# Altium PCB led-relay.PcbDoc
Units mil, origin at the board's own origin, x right, y up, seen from the top; angles counter-clockwise.
Board outline 1653.54 x 1312 mil, 2 copper layers (Top Layer, Bottom Layer), stack 44.685 mil thick; 10 components, 17 nets, 36 pads, 8 vias.
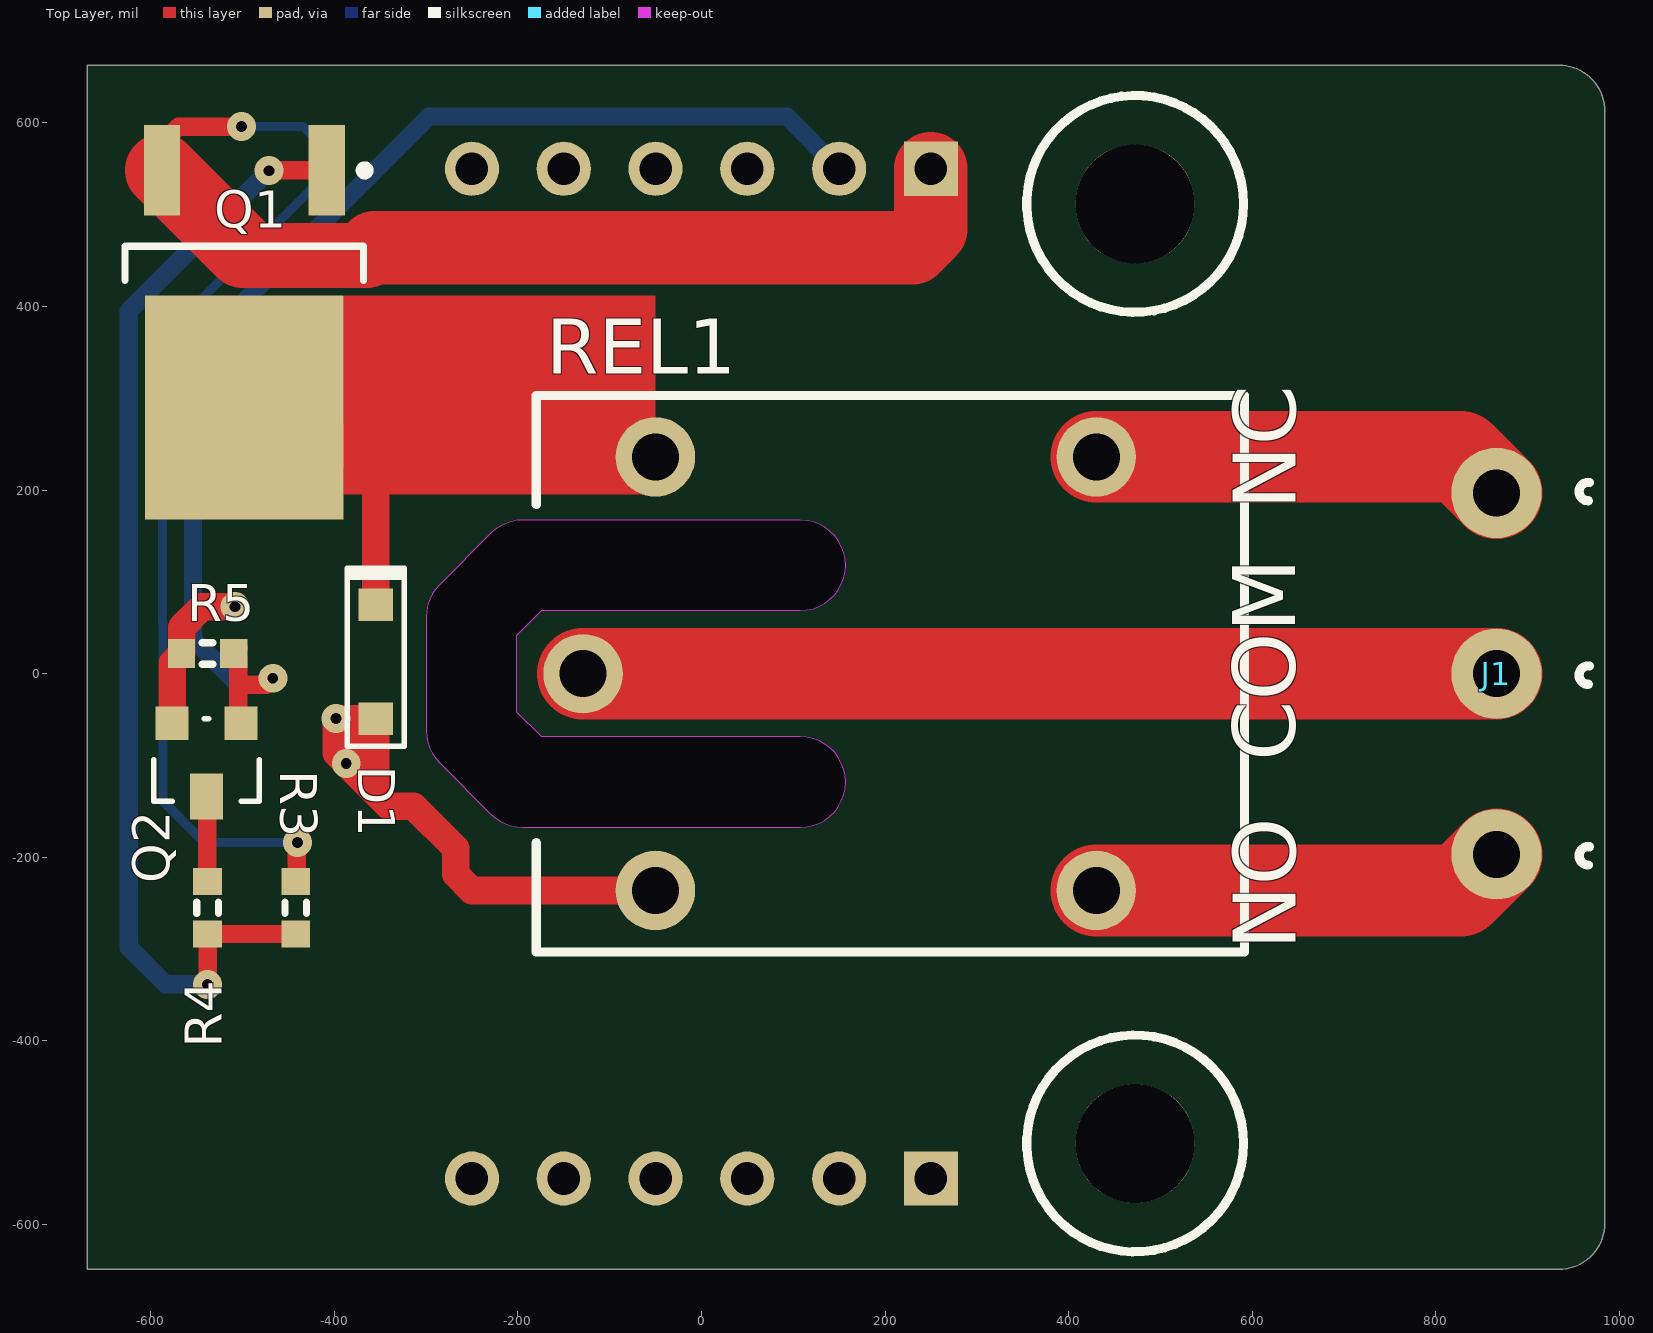
[diagram p0: Top Layer view]
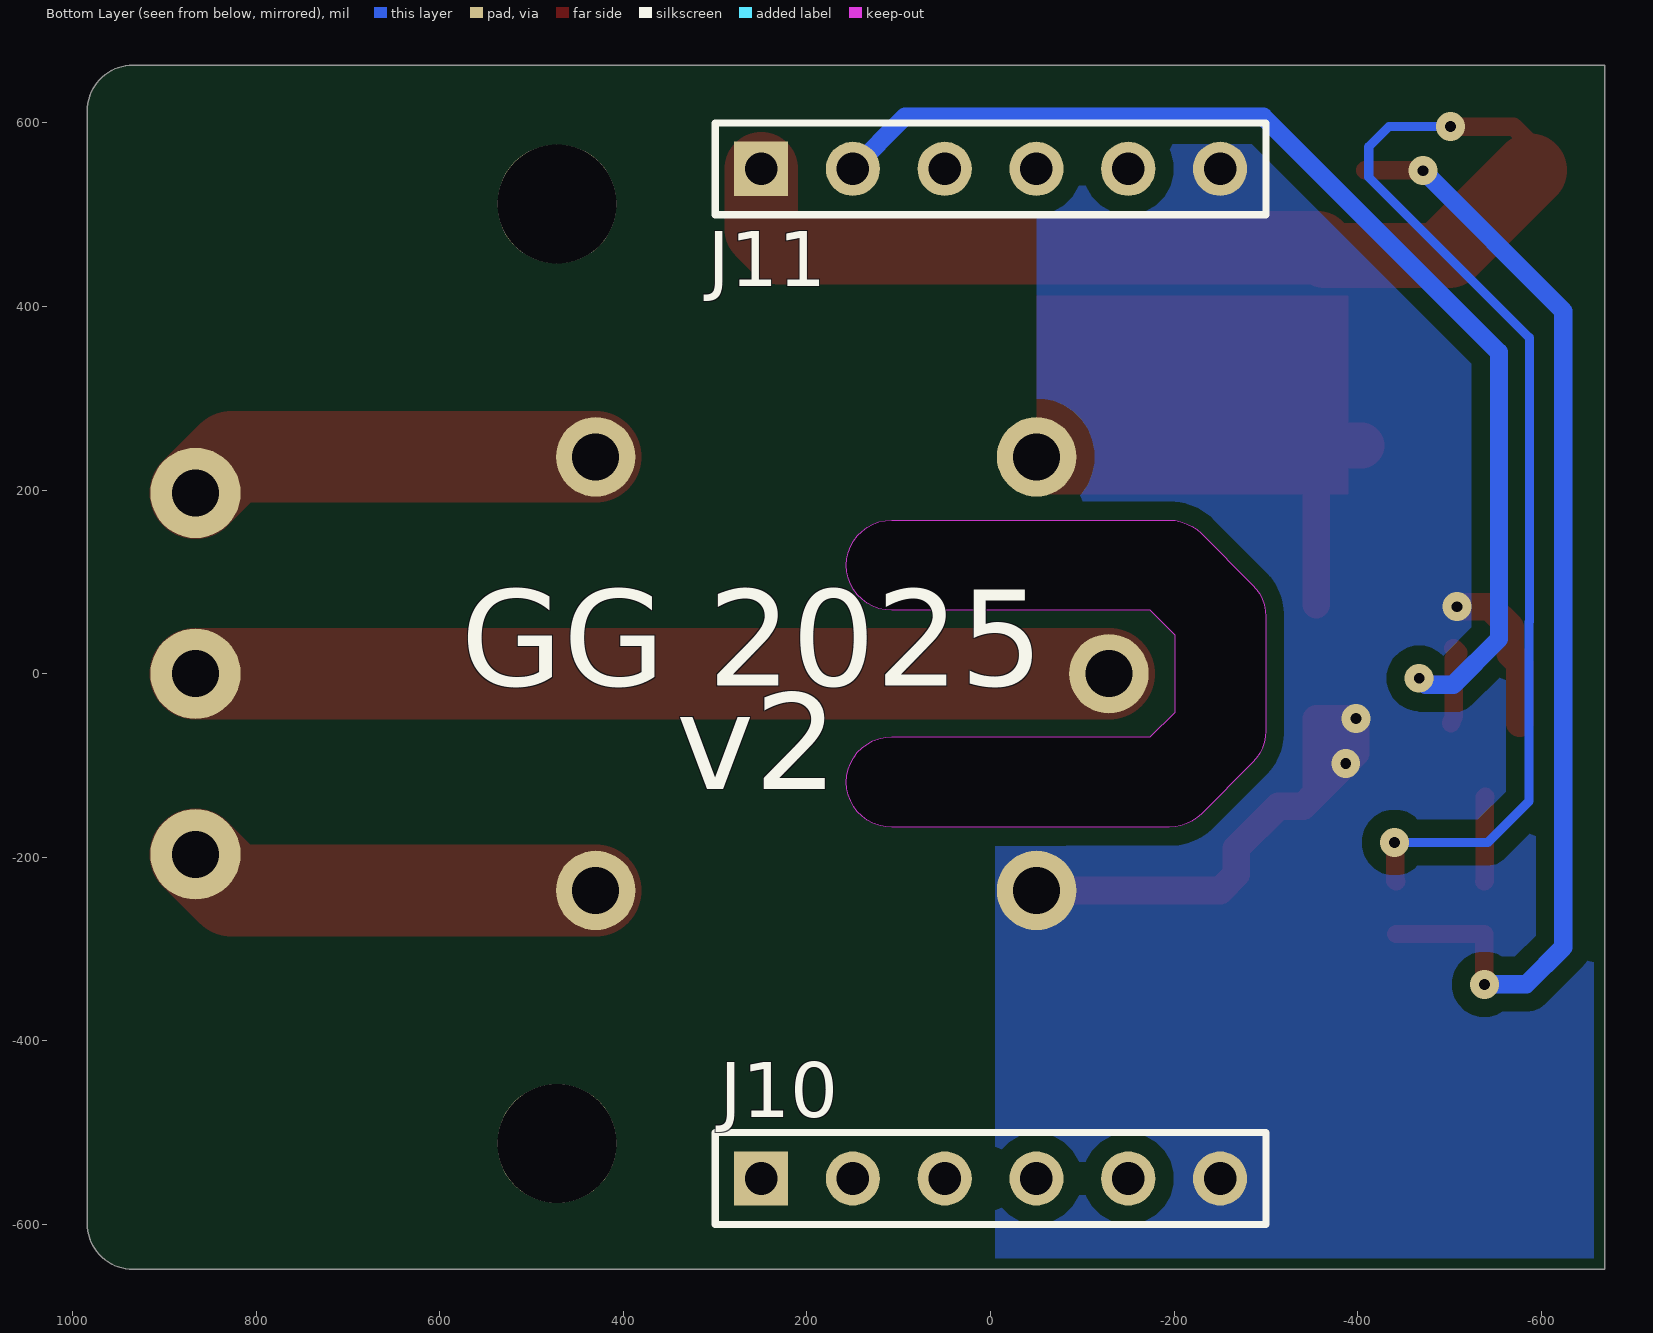
[diagram p1: Bottom Layer view, seen from below]
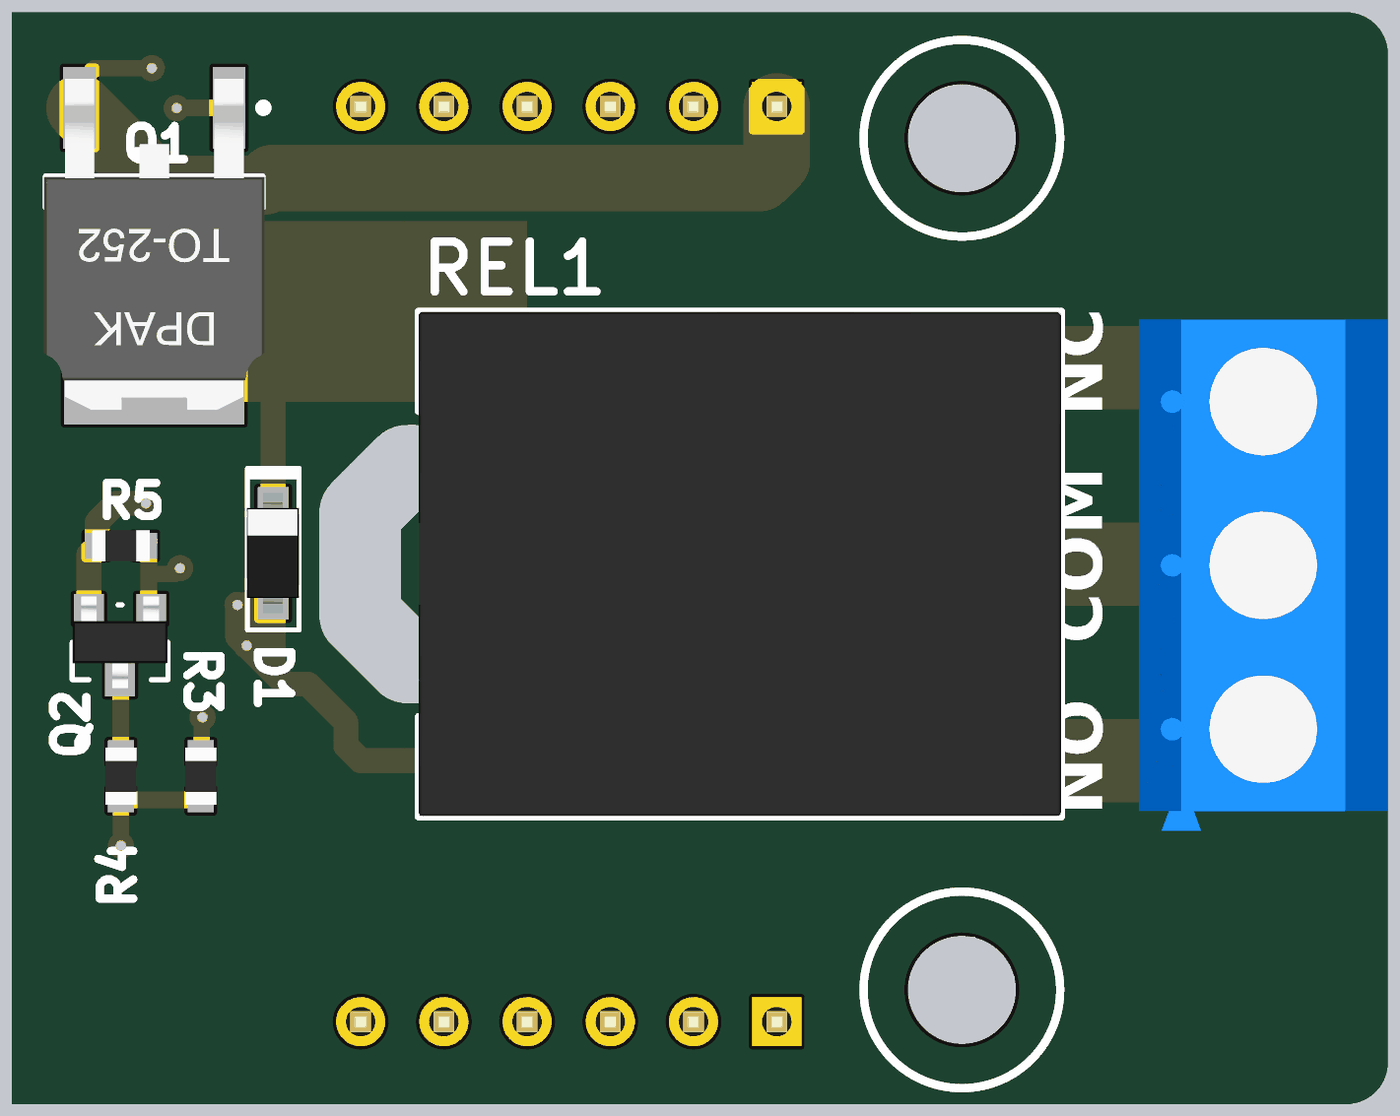
[diagram p2: 3D render of the assembled board from above, using the file's embedded part models]

## Layer stack, top to bottom
Top Solder: solder mask 0.4, Solder Resist, Dk 3.5
Top Layer: signal copper 1.378
Dielectric 1: dielectric 41.9291, FR-4, Dk 4.8
Bottom Layer: signal copper 1.378
Bottom Solder: solder mask 0.4, Solder Resist, Dk 3.5

## Board outline
-669.29,-649 934.25,-649 ccw(c934.25,-599) 984.25,-599 984.25,613 ccw(c934.25,613) 934.25,663 -669.29,663
cut-out: -285.28,-97.02 -229.38,-152.92 ccw(c-194.57,-118.11) -194.57,-167.34 107.8,-167.34 ccw(c107.8,-118.11) 157.02,-118.11 ccw(c107.8,-118.11) 107.8,-68.88 -174.18,-68.88 -201.24,-41.82 -201.24,41.82 -174.18,68.88 107.8,68.88 ccw(c107.8,118.11) 157.02,118.11 ccw(c107.8,118.11) 107.8,167.34 -194.57,167.34 ccw(c-194.57,118.11) -229.38,152.92 -285.28,97.02 ccw(c-250.47,62.21) -299.7,62.21 -299.7,-62.21 ccw(c-250.47,-62.21)

## Design rules (kind name [scope] priority, off if disabled: settings)
BoardOutlineClearance [All] p1: gap=11.81 ignorepadtopadclearanceinfootprint=FALSE
Clearance Clearance_polygon [InPolygon] p1: gap=20 ignorepadtopadclearanceinfootprint=FALSE
Clearance [All] p2: gap=8 ignorepadtopadclearanceinfootprint=TRUE
ComponentClearance ComponentClearance_1 [InComponent('R6') vs InComponent('R8')] p1: gap=-39.37 collisioncheckmode=3 verticalgap=-39.37 showdistances=FALSE
ComponentClearance ComponentClearance_3 [HasFootprint('J_ARK3') vs HasFootprint('J_ARK3')] p2: gap=-39.37 collisioncheckmode=3 verticalgap=-39.37 showdistances=FALSE
ComponentClearance ComponentClearance_2 [HasFootprint('J_ARK2') vs HasFootprint('P_KLDX-0202-A')] p3: gap=-39.37 collisioncheckmode=3 verticalgap=-39.37 showdistances=FALSE
ComponentClearance [All] p4: gap=10 collisioncheckmode=3 verticalgap=10 showdistances=FALSE
HoleSize [All] p1: absolutevalues=TRUE maxlimit=157.48 minlimit=11.81 maxpercent=80.000 minpercent=20.000
MinimumAnnularRing [All] p1: minimumring=7
MinimumSolderMaskSliver [All] p1: minsoldermaskwidth=5
PlaneConnect [All] p1: planeconnectstyle=Direct reliefexpansion=20 reliefentries=4 reliefconductorwidth=10 reliefairgap=10
PolygonConnect VIA [IsVia] p1: connectstyle=Direct reliefconductorwidth=10 reliefentries=4 polygonreliefangle="90 Angle" airgapwidth=10
PolygonConnect [All] p2: connectstyle=Direct reliefconductorwidth=30 reliefentries=4 polygonreliefangle="90 Angle" airgapwidth=15
RoutingVias [All] p1: holewidth=11.81 width=31.5 viastyle="Through Hole" minholewidth=11.81 minwidth=31.5 maxholewidth=11.81 maxwidth=31.5
SilkToSilkClearance [All] p1: silktosilkclearance=1
SilkToSolderMaskClearance [IsPad] p1: minsilkscreentomaskgap=1 clearancetoexposedcopper=TRUE
SolderMaskExpansion [All] p1: expansion=4 istentingtop=FALSE
SupplyNets "Schematic Supply Nets_5" [InNet('VIN')] p1: voltage=0.000
SupplyNets "Schematic Supply Nets_2" [InNet('GND')] p2: voltage=0.000
SupplyNets "Schematic Supply Nets" [InNet('+5V')] p3: voltage=0.000
Width [All] p1: maxlimit=150 minlimit=7 preferedwidth=10 minimp=50.000000 maximp=50.000000 favimp=50.000000
24 further rules are at their usual default settings.

## Components (designator, comment, footprint, x,y, rotation, side; value= is the part's Value field where it differs from the comment)
D1 "1N4148W" SOD123 -355,13 r270 top value=1N4148W-E3-08
J1 "ARK3" J_ARK3 866.14,0 r270 top locked value=DG301-5.0-03P-12-18A(H)
J10 "Goldpin" P_HEADER_1x6_2.54 0,-550 r180 bottom locked value=DS1021-1*6SF1-1
J11 "Goldpin" P_HEADER_1x6_2.54 0,550 r180 bottom locked value=DS1021-1*6SF1-1
Q1 "AOD423" DPAK_TO252-3_SC63_M -498,383 r270 top
Q2 "2N7002K-7" SOT23_TO236_SC59 -539.1,-94.01 r180 top
R3 "Resistor" R_0603_1608 -442,-255 r90 top value=10k
R4 "Resistor" R_0603_1608 -538,-255 r90 top value=10k
R5 "Resistor" R_0603_1608 -538.1,21.99 r180 top value=10k
REL1 "SPDT" SRD-S-124D4 190,0 r0 top value=SRD-S-124D4

## Footprints (in the part's own frame and the unit in brackets; to place one, negate y for a bottom-side part, rotate by r counter-clockwise, add the part's x,y. Pads: shape width x height; smd on the part's side, far side on the other; paste and mask are expansions set on the pad)
DPAK_TO252-3_SC63_M [mm] "D-PAK, 3-Pads+1-heatsink, Body 6,20x6,60mm (max), IPC Medium Density"
  rect 2.5x1 smd: 1(-4.2,2.28) 3(-4.2,-2.28)
  rect 6.2x5.5 smd: 2(2.362,0)
  silkscreen extent -4.32,-3.3 -1.15,3.46, body extent -5.08,-3.37 5.02,3.37, height 2.37
J_ARK3 [mm]
  round 2.5 hole 1.3: 1(-5,0) 2(0,0) 3(5,0)
  silkscreen extent -5.29,2.29 5.29,2.57, body extent -7.46,-4.6 8.14,3, height 10.05
P_HEADER_1x6_2.54 [mm] "Connector; Header; 6 Position, Male"
  rect 1.5x1.5 hole 0.9: 1(-6.35,0)
  round 1.5 hole 0.9: 2(-3.81,0) 3(-1.27,0) 4(1.27,0) 5(3.81,0) 6(6.35,0)
  silkscreen extent -7.62,-1.27 7.62,1.27, body extent -7.52,-1.25 7.72,1.25, height 8.2
R_0603_1608 [mm]
  rect 0.75x0.8 smd: 1(-0.725,0) 2(0.725,0)
  silkscreen extent -0.15,-0.3 0.15,0.3, body extent -0.87,-0.47 0.88,0.48, height 0.54
SOD123 [mm]
  rect 0.9x0.95 smd: 1(-1.575,0) 2(1.575,0)
  silkscreen extent -2.59,-0.79 2.34,0.79, body extent -1.86,-0.81 1.84,0.79, height 1.27
SOT23_TO236_SC59 [mil]
  rect 36x36 smd: 1(-37.5,-40) 2(37.5,-40)
  rect 36x50 smd: 3(0,40)
  silkscreen extent -57,-45 58,45, body extent -57,-55 57,55, height 51
SRD-S-124D4 [mm]
  round 2.2 hole 1.3: 1(-6.1,-6) 2(-6.1,6) 3(-8.1,0) 4(6.1,-6) 5(6.1,6)
  silkscreen extent -9.4,-7.7 10.2,7.7, body extent -9.4,-7.7 10.2,7.7, height 15.5

## Part data
D1: library part D_1N4148W_0A15_75V_SOD123, Current=0.15A, Manufacturer=Vishay, Manufacturer Part Number=1N4148W-E3-08, Voltage=75, HelpURL=https://datasheet.octopart.com/1N4148W-E3-08-Vishay-datasheet-17291302.pdf, Part Number=D_1N4148W_0A15_75V_SOD123, SCH_Footprint=SOD123, Supplier 1=TME, Supplier 2="RS Components", Supplier 3=Farnell, Supplier 4=Mouser, Supplier 5=Digi-Key, Supplier 6=LCSC, Supplier Part Number 1=1N4148W-E3-08, Supplier Part Number 2=7003671, Supplier Part Number 3=2433353, Supplier Part Number 4=78-1N4148W-E3-08, Supplier Part Number 5=1N4148W-E3-08CT-ND
J1: library part J_TB-5.0-P-3P, "ARK Screw terminal, 3-Pin", Manufacturer="DEGSON ELECTRONICS", Manufacturer Part Number=DG301-5.0-03P-12-18A(H), Supplier Part Number 1=DG301-5.0-3/6B, HelpURL=https://datasheet.octopart.com/DG301-5.0-03P-12-18A%28H%29-Degson-datasheet-17801202.pdf, Part Number=J_TB-5.0-P-3P, SCH_Footprint=ARK3, Supplier 1=TME, Supplier 2="RS Components", Supplier 3=Farnell, Supplier 4=Mouser, Supplier 5=Digi-Key, Supplier 6=LCSC
J10 J11: library part P_HEADER_1x6_2.54, "Pin Header", Manufacturer=Connfly, Manufacturer Part Number=DS1021-1*6SF1-1, Supplier Part Number 1=ZL201-06G, HelpURL=http://www.tme.eu/en/Document/cc301e58a5da78cb543a94b5a5b7f06a/DS1021.pdf, Part Number=P_HEADER_1x6_2.54, SCH_Footprint="1x6 2.54mm", Supplier 1=TME, Supplier 2="RS Components", Supplier 3=Farnell, Supplier 4=Mouser, Supplier 5=Digi-Key, Supplier 6=LCSC
Q1: library part QP_AOD423, Current=67A, Manufacturer="Alpha&Omega Semiconductor", Voltage=30V, HelpURL=https://www.aosmd.com/sites/default/files/res/datasheets/AOI423.pdf, Manufacturer Part Number=AOD423, Part Number=QP_AOD423, SCH_Footprint=TO252, Supplier 1=TME, Supplier 2="RS Components", Supplier 3=Farnell, Supplier 4=Mouser, Supplier 5=Digi-Key, Supplier 6=LCSC, Supplier Part Number 1=AOD423, Type=P-MOS
Q2: library part QN_2N7002K-7, Current=0A8, Manufacturer="Diodes Inc", Voltage=60V, HelpURL=http://datasheet.octopart.com/2N7002K-7-Diodes-Inc.-datasheet-12515815.pdf, Manufacturer Part Number=2N7002K-7, Part Number=QN_2N7002K-7, SCH_Footprint=SOT23, Supplier 1=TME, Supplier 2="RS Components", Supplier 3=Farnell, Supplier 4=Mouser, Supplier 5=Digi-Key, Supplier 6=LCSC, Supplier Part Number 2=7703383, Supplier Part Number 3=1713825, Supplier Part Number 4=621-2N7002K-7, Supplier Part Number 5=2N7002K-7DICT-ND, Type=N-MOS
R3 R4 R5: library part R_10k_0603_1, Manufacturer=Vishay, Manufacturer Part Number=CRCW060310K0FKTA, Power=100mW, Supplier Part Number 1=CRCW060310K0FKTABC, Tolerance=1%, Voltage=75V, HelpURL=https://octopart.com/datasheet/crcw060310k0fkta-vishay-39447548, Part Number=R_10k_0603_1, SCH_Footprint=0603, Supplier 1=TME, Supplier 2="RS Components", Supplier 3=Farnell, Supplier 4=Mouser, Supplier 5=Digi-Key, Supplier 6=LCSC, Supplier Part Number 3=1652827, Supplier Part Number 4=71-CRCW0603-10K, Supplier Part Number 5=541-2980-1-ND
REL1: library part REL_SRD-S-124D4, Current=10A, Manufacturer=Sanyou, Manufacturer Part Number=SRD-S-124D4, Voltage=24V, HelpURL=https://www.tme.eu/Document/44da8ad0eef567e3e4f0ea3e928322de/SDR-Datasheet.pdf, Part Number=REL_SRD-S-124D4, SCH_Footprint=19.6x15.4mm, Supplier 1=TME, Supplier 2="RS Components", Supplier 3=Farnell, Supplier 4=Mouser, Supplier 5=Digi-Key, Supplier 6=LCSC, Supplier Part Number 1=SRD-S-124D4

## Free pads (board coordinates)
  round 129.92 hole 129.92 unplated: ""(472.44,-511.81) ""(472.44,511.81)

## Via types
v1: diameter 31.5, hole 11.81, Top Layer to Bottom Layer, tented both sides, 8 vias

## Nets (pads, with @x,y where several pads share a name; then routed paths per layer and width w, separated by ;. In a path a pad name is that pad's centre, name@x,y a point inside that pad or via, vN(x,y) a via of type N, cw(c..) or ccw(c..) an arc to the next point about the centre after c; other vN are vias at no path point)
+5V: J10.1
COM: J1.2 REL1.3 | length 995
  Top Layer w100: REL1.3 J1.2
EXT0: J10.2
EXT1: J11.3
EXT2: J10.3
EXT3: J11.4
EXT4: J10.4
EXT5: J11.5
EXT6: J10.5
GND: D1.2 J10.6 J11.6 Q2.2 R5.2 REL1.1 | length 849.2
  Top Layer w30: Q2.2 -576.6,11.52 -566.41,21.72 -566.41,50.37 -543.78,73 v1(-508,73) ; v1(-398,-49.02) -397.71,-49.3 -397.71,-86.88 v1@-387,-97.6 ; v1(-398,-49.02) D1.2@-355.98,-49.01 ; -380.41,-77.59 -386.71,-83.9 v1@-386.71,-97.31 ; REL1.1 -250.14,-236.22 -267.72,-218.65 -267.72,-190.28 -313.72,-144.28 -340.72,-144.28 -355,-130 ; v1(-387,-98) -386.71,-97.71 v1@-386.71,-97.31 ; v1(-387,-98) -355,-130 ; v1(-387,-98) v1@-387,-97.6 ; v1@-387,-97.6 v1@-386.71,-97.31 ; v1@-386.71,-97.31 -358.7,-69.3 -358.7,-51.72 D1.2@-355.98,-49.01 ; D1.2@-355.98,-49.01 D1.2 -355,-130
LED_EN: J11.2 Q2.1 R5.1 | length 1384.7
  Top Layer w20: R5.1@-503.81,27.74 -504.79,27.74 -509.56,22.98 R5.1 -504.79,16.24 -504.79,-11.32 ; Q2.1 -504.79,-46.01 -504.79,-11.32 ; v1(-467,-5) -474,-12 -504.11,-12 -504.79,-11.32
  Bottom Layer w20: v1(-467,-5) -474,-12 -504.11,-12 -554,37.89 -554,350 -297,607 93,607 J11.2
NC: J1.1 REL1.5 | length 452.3
  Top Layer w100: REL1.5 826.77,236.22 J1.1
NetD1_1: D1.1 Q1.2 REL1.2 | length 532.9
  Top Layer w30: D1.1 -355,248.65
  Top Layer w50: Q1.2@-404.24,248.65 -355,248.65 -62.58,248.65 REL1.2
NetQ1_1: Q1.1 R3.1 R4.1 | length 1226
  Top Layer w20: v1(-538,-338.46) R4.1 R3.1 ; v1(-471,548) -470.65,548.35 Q1.1
  Bottom Layer w20: v1(-538,-338.46) -538.2,-338.25 -583.75,-338.25 -624,-298 -624,395 v1(-471,548)
NetQ2_3: Q2.3 R4.2 | length 92.9
  Top Layer w20: Q2.3 -538.55,-134.56 -538.55,-225.91 R4.2
NO: J1.3 REL1.4 | length 452.3
  Top Layer w100: REL1.4 826.77,-236.22 J1.3
VIN: J11.1 Q1.3 R3.2 | length 2170
  Top Layer w20: Q1.3 -587.76,577.88 -569.65,596 v1(-501,596) ; R3.2 -441,-225.46 -441,-185 v1(-440,-184)
  Top Layer w71.09: -499.46,460.05 -495,455.59 -364.22,455.59 -355.81,464
  Top Layer w80: Q1.3 -499.46,460.05 ; -355.81,464 230,464 250,484 J11.1
  Bottom Layer w10: v1(-501,596) -434,596 -412,574 -412,541 -587,366 -587,57 -586.6,56.6 -586.6,-139.01 -541.61,-184 v1(-440,-184)

## Polygon pours and split planes (outlines as drawn)
GND on Bottom Layer "GND_L02_P000" (solid, remove dead copper, pour order 0): -661,660 -50.16,660 -50.16,188 -82.68,188 -82.68,-188 -5,-188 -5,-649 -669.29,-649

## Other copper
Top Layer:
  rectangle net NetD1_1: -389.73,195 -50.16,412.05

## Silkscreen, mask and mechanical layers (free items; w line width, h text height)
Top Overlay:
  circle w10: c472.44,511.81 r118.11
  circle w10: c472.44,-511.81 r118.11
  text "NC" at 670.44,177.8 h118.11 r90
  text "COM" at 670.06,-95.58 h118.11 r90
  text "NO" at 670.44,-301.42 h118.11 r90
Bottom Overlay:
  text "GG 2025" at 577.31,-47.4 h180
  text "v2" at 342.68,-160.19 h180
Mechanical 1:
  lines w10: -669.29,-649 934.25,-649 ccw(c934.25,-599) 984.25,-599 984.25,613 ccw(c934.25,613) 934.25,663 -669.29,663 -669.29,-649
  lines w98.43: 107.8,-118.11 -194.57,-118.11 -250.47,-62.21 -250.47,62.21 -194.57,118.11 107.8,118.11